# EAGLE board Projet Elec-Groupe4 (EAGLE 8.1.0)
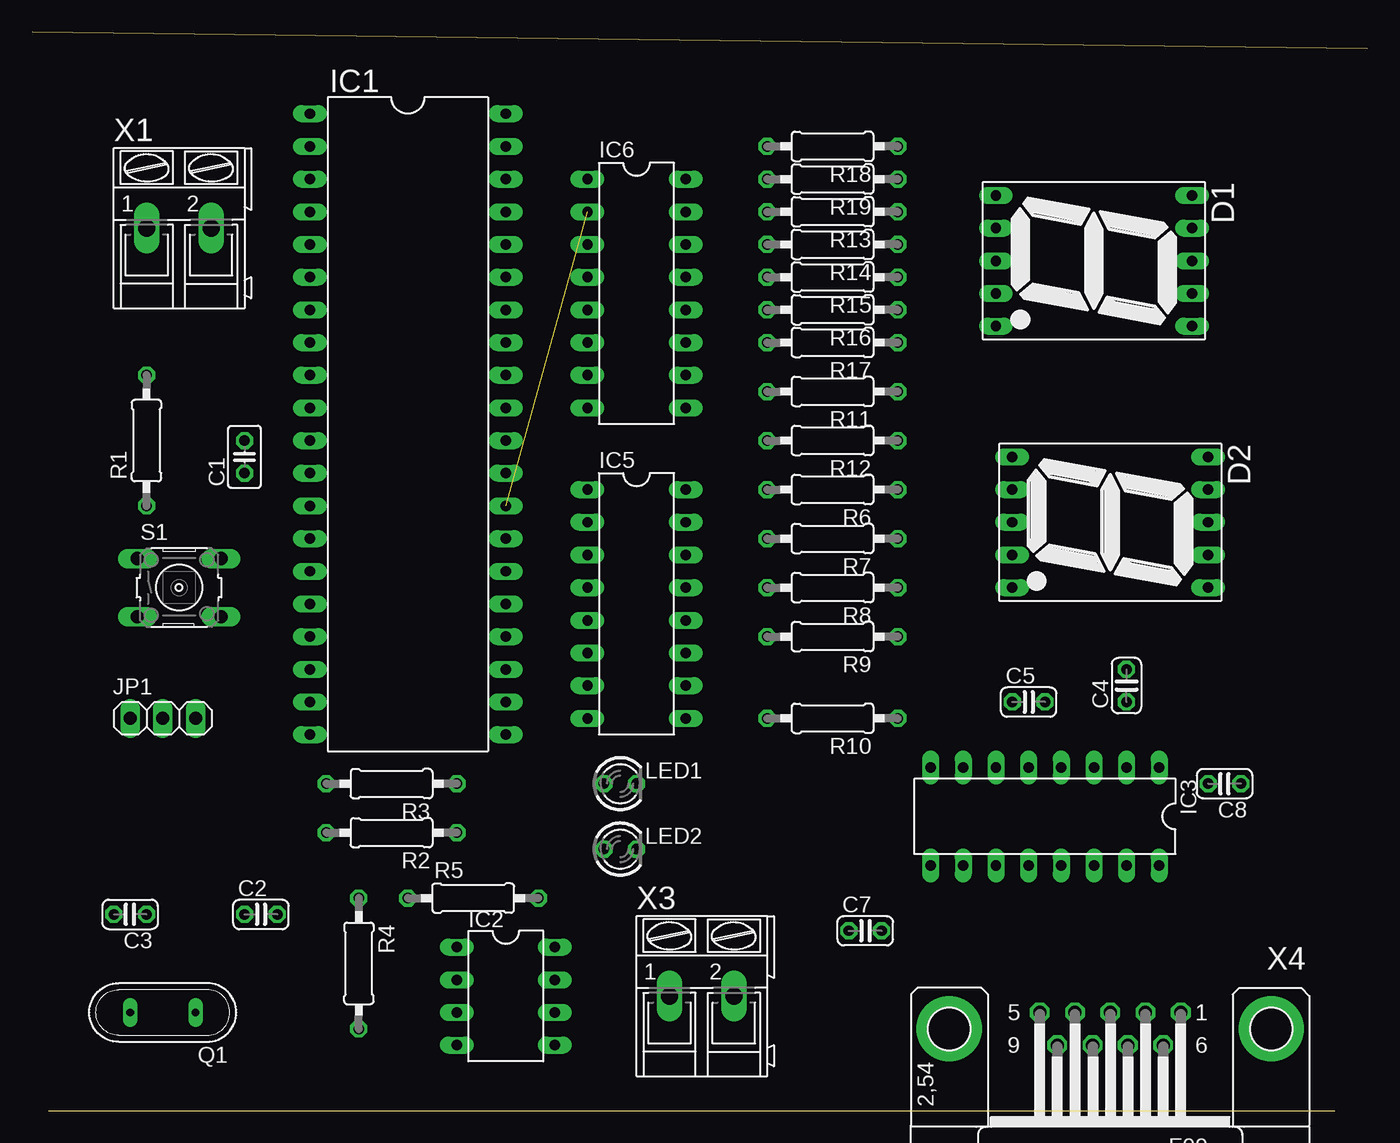
[diagram p0: board, top side]
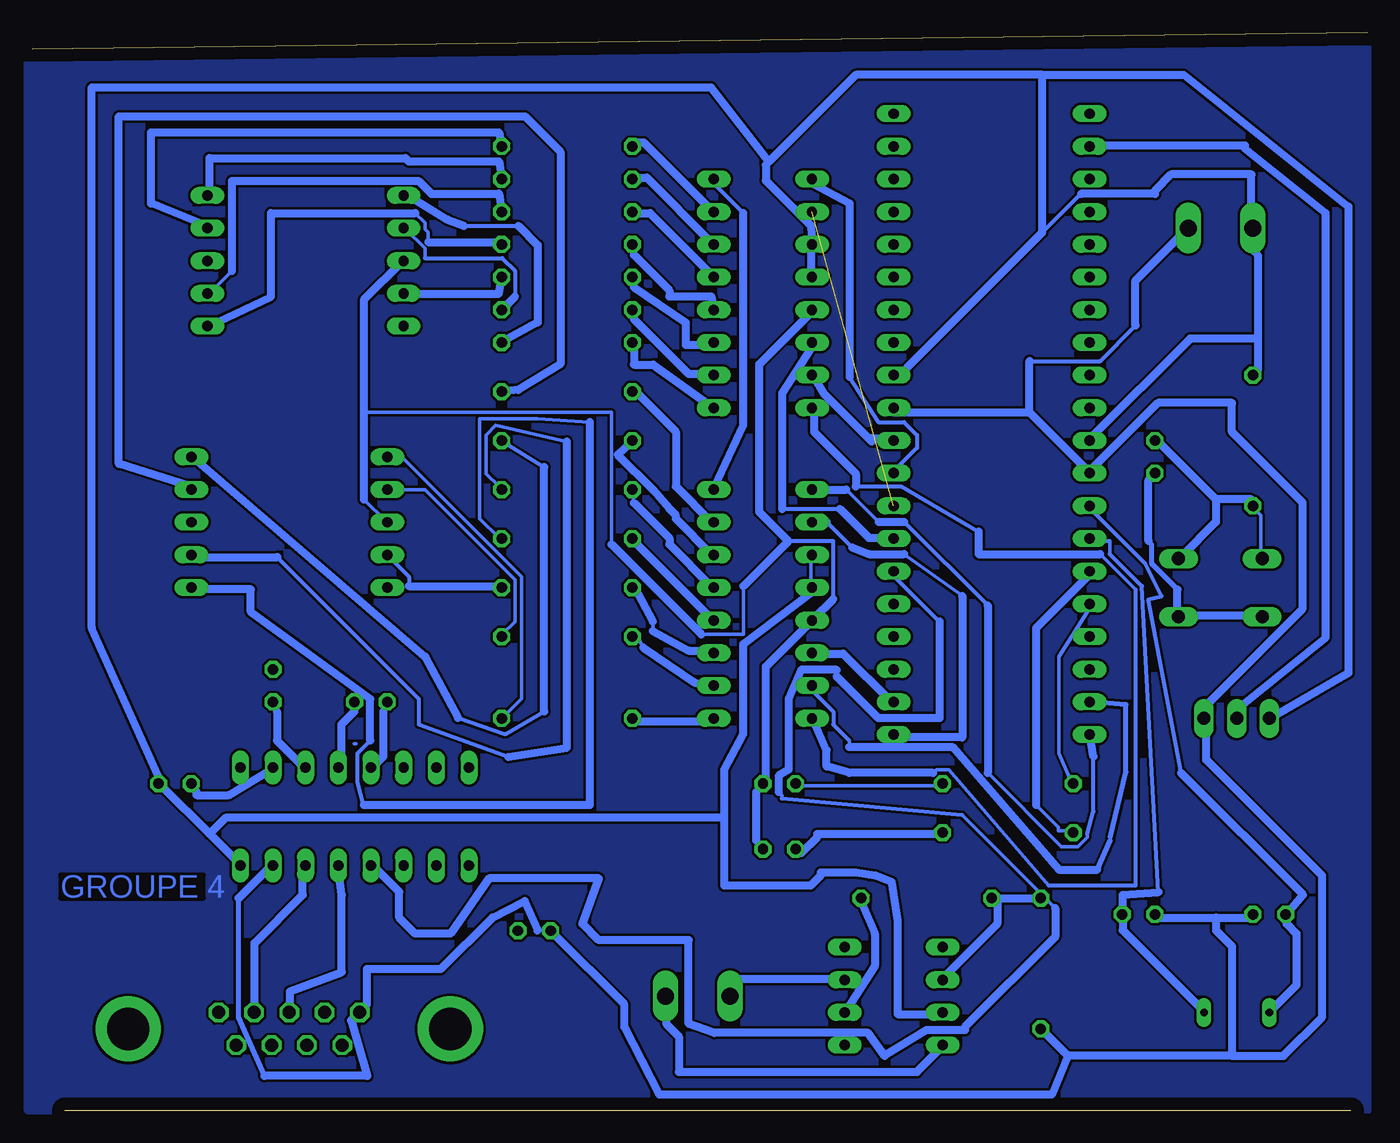
[diagram p1: board, bottom side, seen from below]

Size 103.81 x 83.81 mm. Coordinates in mm from the lower left corner, seen from the top.
Outline: 1.27,0 101.27,0
Outline: 103.81,82.54 0,83.81
Copper layers (1*16): Top 0.035mm / dielectric 1.5mm / Bottom 0.035mm
Design rules "default": minimum track width 10mil, minimum drill 24mil, track to track 8mil, track to pad 8mil, pad to pad 8mil, via to via 8mil, smd to smd 8mil, copper to edge 40mil, drill to drill 8mil, minimum pad ring 10mil, minimum via ring 8mil, stop-mask expansion 4mil, vias tented up to drill 0mil, thermal gap 10mil

## Footprints (pad centres in the part's own frame; a part is rotated, then mirrored left to right if it is on the bottom)
C025-025X050 = drill 0.813 octagon: 1 -1.27,0; 2 1.27,0
C025-024X044 = drill 0.813 octagon: 1 -1.27,0; 2 1.27,0
7SEG-13 = drill 0.813 long: 1 -5.08,-7.62; 2 -2.54,-7.62; 3 0,-7.62; 4 2.54,-7.62; 5 5.08,-7.62; 6 5.08,7.62; 7 2.54,7.62; 8 0,7.62; 9 -2.54,7.62; 10 -5.08,7.62
DIL40 = drill 0.813 long: 1 -24.13,-7.62; 2 -21.59,-7.62; 3 -19.05,-7.62; 4 -16.51,-7.62; 5 -13.97,-7.62; 6 -11.43,-7.62; 7 -8.89,-7.62; 8 -6.35,-7.62; 9 -3.81,-7.62; 10 -1.27,-7.62; 11 1.27,-7.62; 12 3.81,-7.62; 13 6.35,-7.62; 14 8.89,-7.62; 15 11.43,-7.62; 16 13.97,-7.62; 17 16.51,-7.62; 18 19.05,-7.62; 19 21.59,-7.62; 20 24.13,-7.62; 21 24.13,7.62; 22 21.59,7.62; 23 19.05,7.62; 24 16.51,7.62; 25 13.97,7.62; 26 11.43,7.62; 27 8.89,7.62; 28 6.35,7.62; 29 3.81,7.62; 30 1.27,7.62; 31 -1.27,7.62; 32 -3.81,7.62; 33 -6.35,7.62; 34 -8.89,7.62; 35 -11.43,7.62; 36 -13.97,7.62; 37 -16.51,7.62; 38 -19.05,7.62; 39 -21.59,7.62; 40 -24.13,7.62
DIL08 = drill 0.813 long: 1 -3.81,-3.81; 2 -1.27,-3.81; 3 1.27,-3.81; 4 3.81,-3.81; 5 3.81,3.81; 6 1.27,3.81; 7 -1.27,3.81; 8 -3.81,3.81
DIL16 = drill 0.813 long: 1 -8.89,-3.81; 2 -6.35,-3.81; 3 -3.81,-3.81; 4 -1.27,-3.81; 5 1.27,-3.81; 6 3.81,-3.81; 7 6.35,-3.81; 8 8.89,-3.81; 9 8.89,3.81; 10 6.35,3.81; 11 3.81,3.81; 12 1.27,3.81; 13 -1.27,3.81; 14 -3.81,3.81; 15 -6.35,3.81; 16 -8.89,3.81
1X03 = drill 1.016 long: 1 -2.54,0; 2 0,0; 3 2.54,0
LED3MM = drill 0.813 octagon: A -1.27,0; K 1.27,0
QS = drill 0.61 long: 1 -2.54,0; 2 2.54,0
0207/10 = drill 0.813 octagon: 1 -5.08,0; 2 5.08,0
B3F-10XX = drill 1.016 long: 1 -3.251,2.261; 2 3.251,2.261; 3 -3.251,-2.261; 4 3.251,-2.261
AK300/2 = drill 1.321 long: 1 -2.515,0; 2 2.489,0
F09HP = drill 1.016 octagon: 1 -5.486,-1.27; 2 -2.743,-1.27; 3 0,-1.27; 4 2.743,-1.27; 5 5.486,-1.27; 6 -4.115,1.27; 7 -1.372,1.27; 8 1.372,1.27; 9 4.115,1.27 | drill 3.302 pad 5.08: G1 -12.522,0; G2 12.522,0

## Placement (x,y rotation side)
C1  [C025-025X050]  16.51,50.8 90 top
C2  [C025-024X044]  17.78,15.24 0 top
C3  [C025-024X044]  7.62,15.24 180 top
C4  [C025-024X044]  85.09,33.02 90 top
C5  [C025-024X044]  77.47,31.75 0 top
C7  [C025-024X044]  64.77,13.97 0 top
C8  [C025-024X044]  92.71,25.4 180 top
D1  [7SEG-13]  82.55,66.04 270 top
D2  [7SEG-13]  83.82,45.72 270 top
IC1  PIC16F877P  [DIL40]  29.21,53.34 270 top
IC2  [DIL08]  36.83,8.89 270 top
IC3  MAX232  [DIL16]  78.74,22.86 180 top
IC5  4511N  [DIL16]  46.99,39.37 270 top
IC6  4511N  [DIL16]  46.99,63.5 270 top
JP1  [1X03]  10.16,30.48 0 top
LED1  TLLG4400  [LED3MM]  45.72,25.4 0 top
LED2  TLLG4400  [LED3MM]  45.72,20.32 0 top
Q1  [QS]  10.16,7.62 180 top
R1  [0207/10]  8.89,52.07 90 top
R2  [0207/10]  27.94,21.59 180 top
R3  [0207/10]  27.94,25.4 180 top
R4  [0207/10]  25.4,11.43 270 top
R5  [0207/10]  34.29,16.51 0 top
R6  [0207/10]  62.23,48.26 180 top
R7  [0207/10]  62.23,44.45 180 top
R8  [0207/10]  62.23,40.64 180 top
R9  [0207/10]  62.23,36.83 180 top
R10  [0207/10]  62.23,30.48 180 top
R11  [0207/10]  62.23,55.88 180 top
R12  [0207/10]  62.23,52.07 180 top
R13  [0207/10]  62.23,69.85 180 top
R14  [0207/10]  62.23,67.31 180 top
R15  [0207/10]  62.23,64.77 180 top
R16  [0207/10]  62.23,62.23 180 top
R17  [0207/10]  62.23,59.69 180 top
R18  [0207/10]  62.23,74.93 180 top
R19  [0207/10]  62.23,72.39 180 top
S1  [B3F-10XX]  11.43,40.64 0 top
X1  [AK300/2]  11.43,68.58 0 top
X3  [AK300/2]  52.07,8.89 0 top
X4  [F09HP]  83.82,6.35 180 top

## Library data of the parts
C1-C5 C7 C8 R1-R19 = rcl
D1 D2 Q1 = special
IC1 = microchip; MF: MICROCHIP; MPN: PIC16F877-04/P; OC_FARNELL: 9761349; OC_NEWARK: 61K3463
IC2 = ic-package
IC3 = maxim; MF: MAXIM; MPN: MAX232ACPE+; OC_FARNELL: 9723773; OC_NEWARK: 68K4544
IC5 IC6 = 45xx
JP1 = pinhead
LED1 LED2 = led; MF: VISHAY SEMICONDUCTOR; OC_FARNELL: 1612435
S1 = switch-omron; MPN: B3F-1000; OC_FARNELL: 176432; OC_NEWARK: 36M3542
X1 X3 = con-ptr500; OC_FARNELL: unknown; OC_NEWARK: unknown
X4 = con-subd; OC_FARNELL: unknown; OC_NEWARK: unknown

## Nets
GND: D1.3 D2.3 IC5.5 IC6.5 LED1.K LED2.K
N$1: C5.2 IC3.4
N$2: C2.2 IC1.14 Q1.1
N$3: C8.1 IC1.11 IC1.32 IC2.3 IC3.16 IC5.3 IC5.4 IC6.3 IC6.4 JP1.1 R1.2 X1.1
N$4: C1.2 R1.1 S1.1 S1.2
N$5: C1.1 S1.3 S1.4
N$6: C5.1 IC3.5
N$7: C3.2 IC1.13 Q1.2
N$9: IC1.25
N$10: IC1.2 JP1.2
N$11: IC1.26 IC3.12
N$12: IC3.14 X4.2
N$13: IC3.13 X4.3
N$14: C4.1 IC3.3
N$15: C4.2
N$16: IC3.6
N$17: C8.2 IC3.2
N$18: IC5.13 R6.2
N$19: D2.7 R6.1
N$20: IC5.12 R7.2
N$21: D2.6 R7.1
N$22: IC5.11 R8.2
N$23: D2.9 R11.1
N$24: D2.10 R12.1
N$25: IC2.7 X3.1
N$26: IC1.19 IC5.7
N$27: IC1.20 IC5.1
N$28: IC1.21 IC5.2
N$29: IC1.22 IC5.6
N$30: IC6.13 R13.2
N$31: D1.7 R13.1
N$32: D1.6 R14.1
N$33: IC6.12 R14.2
N$34: IC6.11 R15.2
N$35: IC1.27 IC6.6
N$36: IC1.28 IC6.2
N$37: IC1.29 IC6.1
N$38: IC1.30 IC6.7
N$39: IC1.15 R2.2
N$40: LED2.A R2.1
N$41: IC2.4 X3.2
N$42: IC2.2 R4.1 R5.1
N$44: LED1.A R3.1
N$45: IC2.6 R5.2
N$46: D2.4 R8.1
N$47: D1.9 R18.1
N$48: D1.10 R19.1
N$49: IC5.10 R9.2
N$50: D2.2 R9.1
N$51: IC5.9 R10.2
N$52: D2.1 R10.1
N$53: IC5.15 R11.2
N$54: IC5.14 R12.2
N$55: IC6.10 R16.2
N$56: IC6.9 R17.2
N$57: IC6.15 R18.2
N$58: IC6.14 R19.2
N$59: D1.4 R15.1
N$60: D1.2 R16.1
N$61: D1.1 R17.1
N$63: IC1.16 R3.2
N$65: C2.1 C3.1 C7.1 IC1.12 IC1.31 IC3.15 JP1.3 R4.2 X1.2 X4.5
VDD: IC5.16 IC6.16
VSS: IC5.8 IC6.8

## Tracks (layer width: path | path; a pad name or v marks a point on that pad's centre or on a via)
GND
  Bottom 0.254: 47.52,21 47.02,20.5 LED2.K | 47.52,24.75 47.02,25.25 LED1.K 46.77,25.5 | 43.27,38 IC5.5 43.02,38.25 | 78.02,47.5 76.27,45.75 D2.3 | 75.02,66 D1.3 | 43.27,62 IC6.5 | 78.02,54.25 58.77,54.25 58.77,44 | 51.77,37 48.52,37 48.52,40.75
  Bottom 0.305: 45.02,44.25 41.52,44.25 41.52,39.75
  Bottom 0.61: 47.52,24.75 47.52,21 | 43.27,38 46.77,34.5 46.77,25.5 | 78.02,47.5 78.02,54.25 78.02,63 75.02,66 | 43.27,62 47.27,58 47.27,46.5 45.02,44.25 48.52,40.75 | 43.02,38.25 41.52,39.75 | 51.77,37 58.77,44
N$1
  Bottom 0.254: 78.77,31 78.77,31.75 C5.2 | 79.77,26.75 IC3.4
  Bottom 0.61: 79.77,26.75 79.77,30 78.77,31
N$2
  Bottom 0.254: 12.77,7.75 Q1.1 | 19.02,15 C2.2 19.02,15.25 | 20.02,43.25 20.02,44.25 | 21.52,44.25 IC1.14
  Bottom 0.305: 20.02,44.25 21.52,44.25 | 20.02,43.25 17.52,40.75 16.25,16.98
  Bottom 0.61: 12.77,7.75 19.02,14 19.02,15 | 16.25,16.98 19.02,16.75 19.02,15.25
N$3
  Bottom 0.254: 43.27,65 IC6.4 | 43.27,67.25 IC6.3 | 8.52,57.5 8.77,57.25 R1.2 | 8.77,66.75 8.52,66.5 | 8.77,68.5 X1.1 9.02,68.75 | 21.52,52.25 IC1.11 | 35.77,57.75 35.77,57.25 36.77,57.25 IC1.32 | 16.52,71.5 16.52,71.25 | 7.52,30.5 JP1.1 | 46.52,73.75 46.77,73.5 | 87.77,19.25 IC3.16 | 93.77,25.25 C8.1 94.02,25.5 94.02,26 | 42.52,18.25 42.52,18.5 | 43.27,40.25 43.27,40.5 IC5.4 43.27,40.75 43.27,43 IC5.3 | 33.02,7.5 IC2.3
  Bottom 0.305: 22.27,71.25 25.27,68.25
  Bottom 0.61: 43.27,67.25 43.27,65 | 8.52,66.5 8.52,60 | 8.52,60 8.52,57.5 | 8.77,68.5 8.77,66.75 | 21.52,52.25 13.77,60 8.52,60 | 35.77,57.75 25.27,68.25 25.27,80.5 | 16.52,71.25 22.27,71.25 | 16.52,71.5 15.27,72.75 9.02,72.75 9.02,68.75 | 7.52,30.5 1.48,34 1.48,70.25 14.27,80.5 25.27,80.5 | 46.77,73.5 46.77,72.27 43.27,68.77 IC6.3 | 25.27,80.5 39.77,80.5 46.52,73.75 51.02,79.52 99.17,79.52 99.17,37.5 94.02,26 | 93.77,25.25 90.02,21.5 | 90.02,21.5 87.77,19.25 | 33.02,7.5 36.52,7.5 36.52,14.75 37,17.77 38.27,18.27 39.77,18.5 42.52,18.5 | 42.52,18.25 43.27,17.5 50.02,17.5 50.02,22.75 | 50.02,22.75 50.02,26.5 48.54,29.25 48.54,36.25 43.27,40.25 | 90.02,21.5 88.77,22.75 50.02,22.75
N$4
  Bottom 0.254: S1.1 8.27,43 8.27,46.25 8.77,46.75 R1.1 9.02,47 9.02,47.5 | 16.27,52 C1.2 | 14.52,43 S1.2
  Bottom 0.61: 11.77,47.5 16.27,52 | 9.02,47.5 11.77,47.5 | 14.52,43 11.77,45.75 11.77,47.5
N$5
  Bottom 0.254: 17.02,49 16.52,49.5 C1.1 | 16.77,44 17.02,44.25 | 14.77,38.5 S1.4 14.52,38.5 | 8.27,38.5 S1.3
  Bottom 0.406: 16.77,44 16.77,42.5 14.77,40.5
  Bottom 0.61: 17.02,44.25 17.02,49 | 14.77,38.5 14.77,40.5 | 14.52,38.5 8.27,38.5
N$6
  Bottom 0.254: 76.52,31 76.27,31.25 76.27,31.75 C5.1 | 77.27,26.75 IC3.5
  Bottom 0.61: 77.27,26.75 76.52,27.5 76.52,31
N$7
  Bottom 0.254: 7.52,7.75 Q1.2 | 6.27,15 C3.2 6.27,15.25 | 16,39.98 17.27,42.5 | 21.52,46.75 IC1.13
  Bottom 0.305: 17.27,42.5 21.52,46.75 | 16,39.98 17.02,39.73 14.48,26.23
  Bottom 0.61: 7.52,7.75 5.52,9.75 5.52,13.75 6.27,14.5 6.27,15 | 14.48,26.23 5,16.75 6.27,15.25
N$8
  Bottom 0.254: 78.77,28.5 78.64,28.51
  pour Bottom (isolate 0.8): 0,83.82 0,0 104.14,0 104.14,82.55
N$10
  Bottom 0.254: 9.52,74.75 9.52,75 | 10.02,31.25 10.02,30.5 JP1.2 | 21.52,75 IC1.2
  Bottom 0.61: 9.52,75 21.52,75 | 9.52,74.75 3.25,69.75 3.25,36.75 10.02,31.25
N$11
  Bottom 0.254: 31.27,6.5 31.27,6.25 | 31.52,22.98 24.27,15.73 | 45.52,24.25 45.52,24.5 45.77,24.75 | 41.27,33.75 41.27,34.25 | 36.77,41.5 36.77,41.75 IC1.26 | 77.27,19 IC3.12
  Bottom 0.305: 45.52,24.25 31.52,22.98 | 36.77,41.5 33.27,38
  Bottom 0.61: 77.27,19 75.27,17 75.27,15 74.02,13.75 71.29,13.75 68.27,18.04 59.75,18.04 61.02,14.5 59.77,13.25 52.77,13.25 52.77,6.75 50.79,6.04 38.81,6.04 37.54,4.25 34.27,6.25 31.27,6.25 | 31.27,6.5 24.27,13.5 24.27,15.73 | 45.77,24.75 45.77,26 45,26.5 45,32 44.02,34.25 41.27,34.25 | 41.27,33.75 38.02,30.5 33.27,30.5 33.27,38
N$12
  Bottom 0.254: 82.77,19 IC3.14 | 86.52,7.75 X4.2
  Bottom 0.61: 82.77,19 82.77,16.75 86.52,13 86.52,7.75
N$13
  Bottom 0.254: 80.02,19 IC3.13 | 83.77,7.75 X4.3
  Bottom 0.61: 80.02,19 79.73,16.75 79.73,10.75 83.77,9.25 83.77,7.75
N$14
  Bottom 0.254: 84.77,31 85.02,31.25 85.02,31.75 C4.1 | 82.77,26.75 IC3.3
  Bottom 0.61: 82.77,26.75 84.77,28.75 84.77,31
N$17
  Bottom 0.254: 91.02,24.75 91.02,24.52 | 91.27,25 91.27,25.25 C8.2 | 85.27,26.5 IC3.2
  Bottom 0.61: 85.27,26.5 88.52,24.52 91.02,24.52 | 91.27,25 91.02,24.75
N$18
  Bottom 0.254: 51.02,40.75 IC5.13 | 57.02,47.23 R6.2
  Bottom 0.61: 51.02,40.75 54.27,44 54.27,44.48 57.02,47.23
N$19
  Bottom 0.254: 62.23,51.98 67.77,53.25 68.52,52.5 68.52,49.5 67.52,48.5 R6.1 | 91.27,43 D2.7
  Bottom 0.305: 66.77,27.48 73.75,30.02 73.75,32 84.75,43
  Bottom 0.61: 62.23,51.98 62.23,28.21 66.77,27.48 | 91.27,43 84.75,43
N$20
  Bottom 0.254: 51.02,38.25 IC5.12 | 57.02,44.25 R7.2
  Bottom 0.61: 57.02,44.25 51.02,38.25
N$21
  Bottom 0.254: 60.46,53.5 64.52,53.75 69.02,53.75 69.02,46 67.52,44.5 R7.1 | 91.27,40.5 D2.6
  Bottom 0.305: 77.52,28.75 78.52,27.75 78.52,25.5 78.02,23.73
  Bottom 0.61: 91.27,40.5 86.81,40.5 86.81,38.75 77.52,32 77.52,28.75 | 78.02,23.73 60.46,23.73 60.46,53.5
N$22
  Bottom 0.254: 55.54,38 55.54,37.25 | 51.02,35.75 IC5.11 | 57.02,40.75 R8.2
  Bottom 0.61: 51.02,35.75 52.77,35.75 55.54,37.25 | 57.02,40.75 55.54,38
N$23
  Bottom 0.254: 91.52,48.5 D2.9
  Bottom 0.61: 91.52,48.5 97.08,50.25 97.08,77.27 65.5,77.27 62.73,74.5 62.73,58 66,56 R11.1
N$24
  Bottom 0.254: 64,50 67.27,52 R12.1 | 91.27,50.75 D2.10
  Bottom 0.305: 64,31 67.02,29.25 70.71,30.52
  Bottom 0.61: 64,31 64,50 | 70.71,30.52 73.25,35.27 91.27,50.75
N$25
  Bottom 0.254: 40.77,10.25 IC2.7 | 49.52,9 X3.1
  Bottom 0.61: 40.77,10.25 49.52,10.25 49.52,9
N$26
  Bottom 0.254: 20,21 20,21.25 | 40.27,28.75 40.27,28.27 | 43.02,32.5 43.02,33 IC5.7 | 21.52,31.75 IC1.19
  Bottom 0.305: 40.27,28.75 41.52,30 41.52,31 43.02,32.5
  Bottom 0.406: 21.52,31.75 18.77,31.54 18.77,26.29 20,21.25 | 21,18.73 20,21
  Bottom 0.61: 21,18.73 24,18.73 32.27,28.27 40.27,28.27
N$27
  Bottom 0.254: 21.77,21.5 21.77,21.25 22.52,20.5 23.77,20.5 29.52,26.25 | 40.5,48.25 38,45.75 | 21.52,29 IC1.20 | 43.02,48.25 IC5.1
  Bottom 0.305: 21.29,27.5 21.29,23.25 21.77,21.5 | 36.02,45.75 29.52,39.25
  Bottom 0.61: 21.29,27.5 21.52,29 | 29.52,39.25 29.52,26.25 | 38,45.75 36.02,45.75 | 43.02,48.25 40.5,48.25
N$28
  Bottom 0.254: 36.02,43.25 31.5,40 | 36.77,29 IC1.21 | 43.02,45.75 IC5.2
  Bottom 0.305: 42.04,45.75 40.04,43.75
  Bottom 0.61: 36.77,29 31.5,29 31.5,40 | 36.02,43.25 38.77,43.25 40.04,43.75 | 43.02,45.75 42.04,45.75
N$29
  Bottom 0.254: 37.02,31.75 IC1.22 | 43.02,35.5 IC5.6
  Bottom 0.61: 37.02,31.75 40.77,35.5 43.02,35.5
N$30
  Bottom 0.254: 51.02,65 IC6.13 | 57.02,69.75 R13.2
  Bottom 0.61: 51.02,65 55.77,69.75 57.02,69.75
N$31
  Bottom 0.254: 72.77,71.25 72.77,71.27 | 88.27,65.25 90.02,63.5 D1.7
  Bottom 0.61: 72.77,71.27 67.52,71.27 R13.1 | 72.77,71.25 73.77,72.25 88.27,72.25 88.27,65.25
N$32
  Bottom 0.254: 73.02,67.5 73.02,68.25 73.27,68.5 73.27,69 74.02,69.75 | 67.52,67.5 R14.1 | 90.02,61 D1.6
  Bottom 0.61: 73.02,67.5 67.52,67.5 | 74.02,69.75 85.23,69.75 85.23,63.25 90.02,61
N$33
  Bottom 0.254: 57.02,66.5 57.02,67.25 R14.2
  Bottom 0.61: 57.02,66.5 54.27,63.75 54.27,63.27 51.02,63.27 IC6.12
N$34
  Bottom 0.254: 57.02,64 57.02,64.75 R15.2 | 51.02,59.5 IC6.11
  Bottom 0.61: 51.02,59.5 53,59.5 53,61.25 57.02,64
N$35
  Bottom 0.254: 43.27,59.25 43.27,59.5 IC6.6 | 37.02,44.5 IC1.27
  Bottom 0.305: 45.5,46.75 41.02,46.75
  Bottom 0.61: 37.02,44.5 38.77,44.5 41.02,46.75 | 45.5,46.75 45.5,55.75 43.27,59.25
N$36  (1 unrouted)
N$37
  Bottom 0.254: 43.02,72 43.02,72.25 IC6.1 | 36.77,49.75 IC1.29
  Bottom 0.305: 36.77,49.75 35.02,51.5 35.02,52.5 36.02,53.5 38.02,53.5 40.25,57
  Bottom 0.61: 40.25,57 40.25,70.5 43.02,72
N$38
  Bottom 0.254: 38.52,51.98 38.52,52.25 | 37.02,52.25 IC1.30 | 43.02,57 IC6.7
  Bottom 0.61: 38.52,52.25 37.02,52.25 | 38.52,51.98 42.27,55.73 43.02,57
N$39
  Bottom 0.254: 25.77,23.75 24.02,22 24.02,21.75 23.02,21.75 R2.2 | 21.77,41.5 21.77,41.75 IC1.15
  Bottom 0.61: 25.77,23.75 25.77,37.5 21.77,41.5
N$40
  Bottom 0.254: 42.77,21.25 42.77,21.5 | 44.02,20 44.27,20 44.27,20.25 LED2.A | 33.02,21.5 R2.1
  Bottom 0.61: 42.77,21.5 33.02,21.5 | 44.02,20 42.77,21.25
N$41
  Bottom 0.254: 33.02,5 IC2.4 | 54.52,8.75 X3.2
  Bottom 0.61: 33.02,5 35.02,3 53.52,3 53.52,5.75 54.52,6.75 54.52,8.75
N$42
  Bottom 0.254: 25.52,16.5 R4.1 | 33.02,10.25 IC2.2 | 29.02,16.5 28.77,16.5 R5.1 29.02,16.5
  Bottom 0.61: 25.52,16.5 28.77,16.5 28.77,14.5 33.02,10.25
N$43
  pour Bottom: 0,83.82 0,0 104.14,0 104.14,82.55
N$44
  Bottom 0.254: R3.1 33.02,25.25 44.27,25.25 LED1.A
N$45
  Bottom 0.254: 39.27,16 39.27,16.5 R5.2 | 40.52,7.75 IC2.6
  Bottom 0.61: 40.52,7.75 38.29,11.25 38.29,13.75 39.27,16
N$46
  Bottom 0.254: 67.52,40.75 R8.1
  Bottom 0.305: 74.52,40.75 74.52,41.5 D2.4
  Bottom 0.61: 74.52,40.75 67.52,40.75
N$47
  Bottom 0.254: 90.27,68.75 D1.9
  Bottom 0.61: 90.27,68.75 94.56,70.5 94.56,76.02 67.52,76.02 R18.1
N$48
  Bottom 0.254: 90.02,71.25 D1.10
  Bottom 0.61: 90.02,71.25 90.02,74.02 74.79,74.02 74.54,73.77 67.52,73.77 R19.1
N$49
  Bottom 0.254: 56.29,35.98 57.02,37.25 57.02,37 R9.2
  Bottom 0.61: 56.29,35.98 52.29,33.25 IC5.10
N$50
  Bottom 0.254: R9.1 67.27,37 66.27,38 66.27,41.25 73.27,48.25 76.02,48.25 D2.2
N$51
  Bottom 0.254: 51.02,30.25 IC5.9 | 57.02,30.25 R10.2
  Bottom 0.61: 57.02,30.25 51.02,30.25
N$52
  Bottom 0.254: R10.1 67.27,30.5 65.77,32 65.77,41.5 75.02,50.75 76.02,50.75 D2.1
N$53
  Bottom 0.254: 51.02,45.75 IC5.15 | 57.02,56 R11.2
  Bottom 0.61: 51.02,45.75 53.77,48.5 53.77,52.75 57.02,56
N$54
  Bottom 0.254: 53.77,46.25 53.77,46 | 51.02,43.25 IC5.14
  Bottom 0.61: 53.77,46 51.02,43.25 | 53.77,46.25 54.27,46.75 55.54,48.23 58.29,50.98 R12.2
N$55
  Bottom 0.254: 57.02,61.5 57.02,62 R16.2 | 51.02,57.25 IC6.10
  Bottom 0.61: 51.02,57.25 52.77,57.25 57.02,61.5
N$56
  Bottom 0.254: 51.02,54.75 IC6.9 | 57.02,59.5 R17.2
  Bottom 0.61: 51.02,54.75 55.52,57.98 57.02,57.98 57.02,59.5
N$57
  Bottom 0.254: 57.02,75.25 57.02,75 R18.2 | 51.02,70 IC6.15
  Bottom 0.61: 51.02,70 56.27,75.25 57.02,75.25
N$58
  Bottom 0.254: 51.02,67.5 IC6.14 | 57.02,72.5 R19.2
  Bottom 0.61: 51.02,67.5 56.02,72.5 57.02,72.5
N$59
  Bottom 0.254: 74.77,63.48 74.77,63.5 D1.4
  Bottom 0.61: 74.77,63.48 67.52,63.48 R15.1
N$60
  Bottom 0.254: 73.27,66.25 73.27,67 74.77,68.5 D1.2 | 67.27,62.25 R16.1
  Bottom 0.305: 66.27,63.25 66.27,65.25 67.27,66.25 73.27,66.25
  Bottom 0.61: 66.27,63.25 67.27,62.25
N$61
  Bottom 0.254: 67.27,59.75 R17.1 | 74.77,71.25 D1.1
  Bottom 0.305: 70.23,68.75 66,68.75
  Bottom 0.61: 67.27,59.75 64.5,61.25 64.5,67.25 66,68.75 | 70.23,68.75 71.5,69.25 74.77,71.25
N$63
  Bottom 0.254: R3.2 23.02,25.5 24,27.75 24,35.25 21.77,38.75 21.77,39.25 IC1.16
N$65
  Bottom 0.254: 36.77,54.25 36.77,54.5 IC1.31 | 21.77,49.75 IC1.12 21.52,49.75 | 14.02,68.5 X1.2 | 64.52,14 63.52,14 C7.1 63.27,13.75 | 78.27,7.75 X4.5 | 85.27,19 IC3.15 | 9.02,15 C3.1 | 16.27,15 C2.1 | 25.27,6.25 R4.2 | 12.52,30.25 JP1.3 12.52,30.5 12.52,31.5
  Bottom 0.305: 18.02,61 20.77,58.25 26.27,58.25
  Bottom 0.406: 87.77,16.5 87.77,7.25 85.75,2.69
  Bottom 0.61: 26.27,54.25 21.77,49.75 | 36.77,54.25 26.27,54.25 | 14.02,68.5 18.02,64.5 18.02,61 | 26.27,54.25 26.27,58.25 | 64.52,14 65.52,16.27 68.02,15 72.02,11 77.77,11 77.77,8.25 78.27,7.75 | 87.77,16.5 85.27,19 | 85.75,2.69 77.75,2.69 79.02,7 78.52,7.5 X4.5 | 16.27,15 11.77,15 | 11.77,15 9.02,15 | 23.27,4.25 25.27,6.25 | 10.52,4.25 23.27,4.25 | 10.52,4.25 10.52,12.75 11.77,14 11.77,15 | 12.52,30.25 12.52,27.25 3.52,18.25 3.52,7.25 6.52,4.25 10.52,4.25 | 63.27,13.75 57.77,8.25 57.77,6.5 55.04,1.23 24.54,1.23 23.27,4.25 | 21.52,49.75 16.27,55 10.52,55 10.52,52.75 5.02,47.25 5.02,39 12.52,31.5
VDD
  Bottom 0.254: 50.77,72 50.77,72.25 IC6.16 | 50.77,48.5 IC5.16
  Bottom 0.305: 50.77,72 48.54,69.77
  Bottom 0.61: 50.77,48.5 48.54,53.27 48.54,69.77
VSS
  Bottom 0.254: 33.77,26.25 33.52,26.5 32.52,26.5 24.77,17.48 | 20.77,43.25 18.02,40.5 | 43.02,30.25 IC5.8 | 43.02,54.5 IC6.8
  Bottom 0.305: 24.77,17.48 18.02,17.48 18.02,40.5 | 30.23,45 36.27,48.5 39.77,48.5
  Bottom 0.61: 43.02,30.25 42.04,28 42.04,26.75 40.27,26.25 33.77,26.25 | 20.77,43.25 30.23,43.25 30.23,45 | 39.77,48.5 39.77,49.5 43.02,52.75 43.02,54.5

## Text on the board
Bottom: GROUPE 4